# EAGLE board opamp phase ssb (EAGLE 9.1.2)
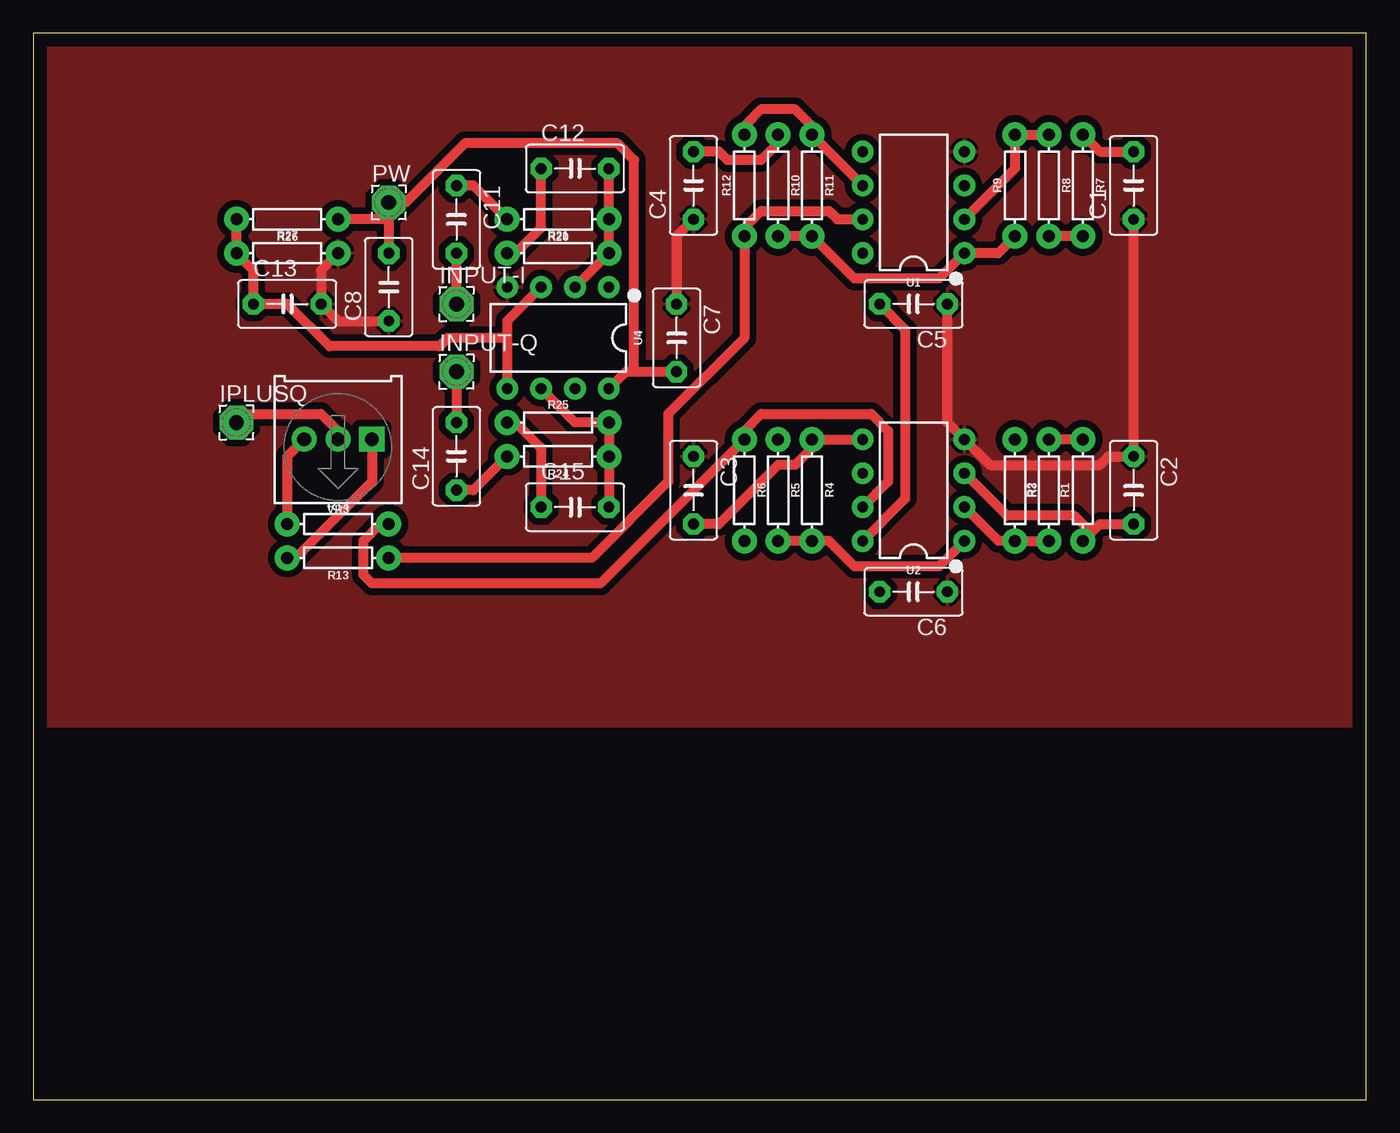
[diagram p0: board, top side]
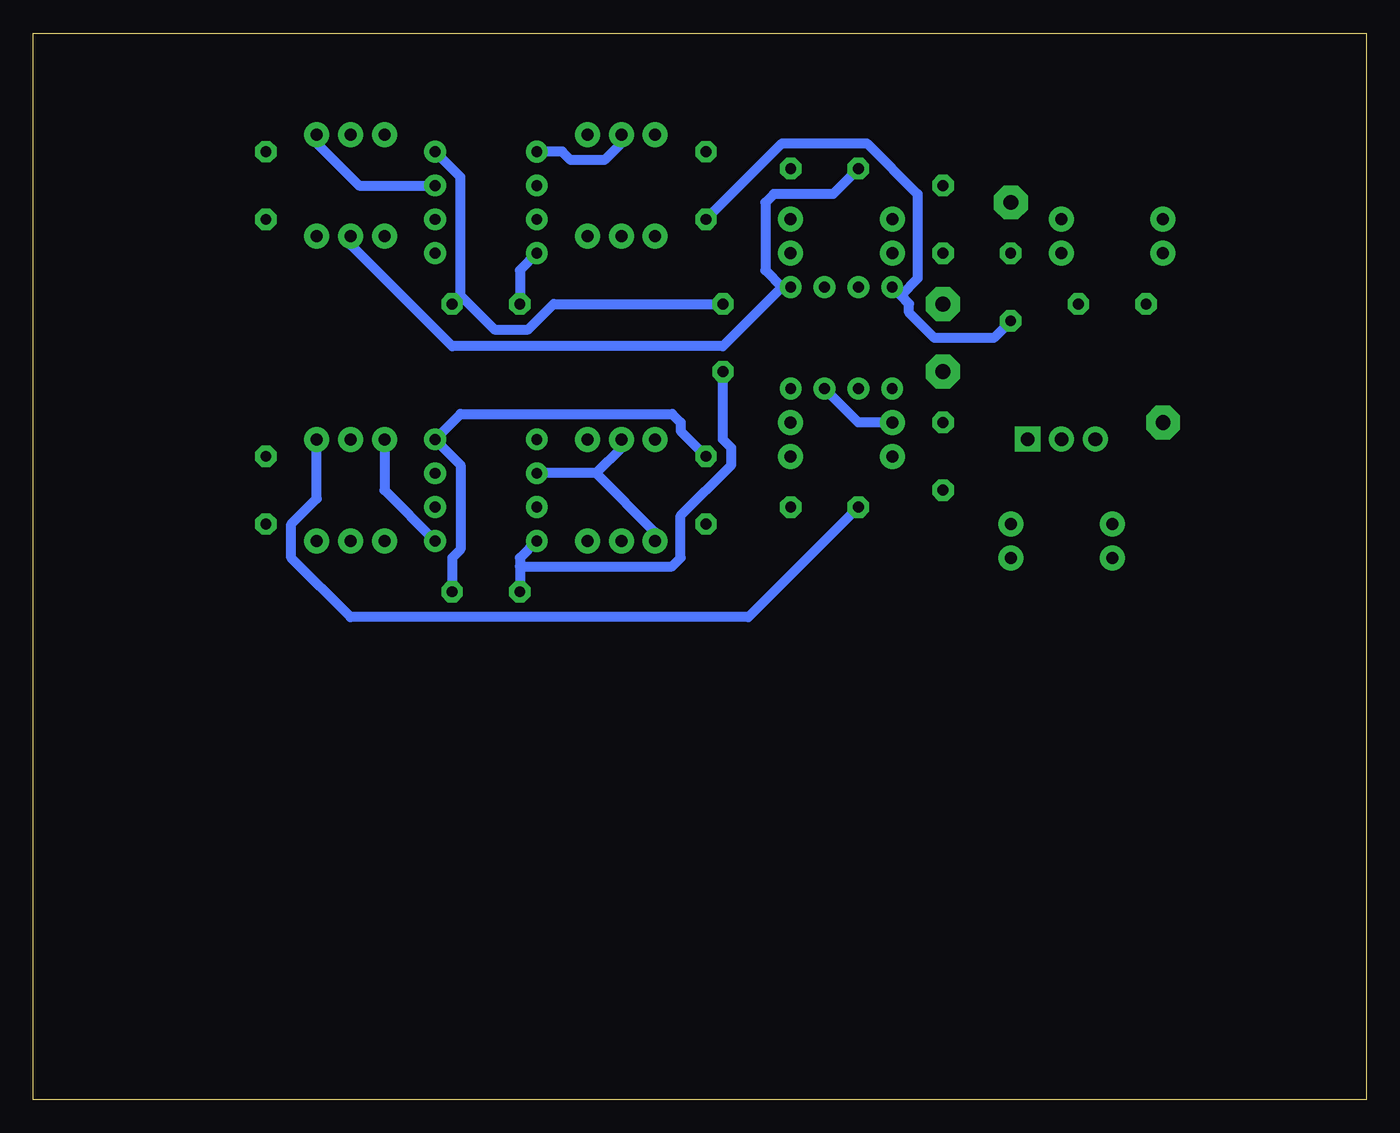
[diagram p1: board, bottom side, seen from below]

Size 100 x 80 mm. Coordinates in mm from the lower left corner, seen from the top.
Outline: 0,0 100,0 100,80 0,80 0,0
Copper layers (1*16): Top 0.035mm / dielectric 1.5mm / Bottom 0.035mm
Design rules "default": minimum track width 6mil, minimum drill 0.35mm, track to track 6mil, track to pad 6mil, pad to pad 6mil, via to via 6mil, smd to smd 6mil, copper to edge 40mil, drill to drill 6mil, minimum pad ring 10mil, minimum via ring 8mil, stop-mask expansion 4mil, vias tented up to drill 0mil, thermal gap 10mil
Net classes: 0 default: width 0.762 mm, drill 0.762 mm, clearance 0.508 mm

## Footprints (pad centres in the part's own frame; a part is rotated, then mirrored left to right if it is on the bottom)
C5B3.5 = drill 0.813 pad 1.6 octagon: 1 -2.54,0; 2 2.54,0
2,54/1,1 = drill 1.118 pad 2.54 octagon: 1 0,0
AXIAL-0.3 = drill 0.9 pad 1.88: P$1 -3.81,0; P$2 3.81,0
DIP08 = drill 0.813 pad 1.626: 1 -3.81,-3.81; 2 -1.27,-3.81; 3 1.27,-3.81; 4 3.81,-3.81; 5 3.81,3.81; 6 1.27,3.81; 7 -1.27,3.81; 8 -3.81,3.81
TRIMPOT-PTH-3386U = drill 1.016 pad 1.88 square: 1 -2.54,-0.015 | drill 1.016 pad 1.88: 2 0,-0.015; 3 2.54,-0.015

## Placement (x,y rotation side)
C1  10nF  [C5B3.5]  82.55,68.58 90 top
C2  10nF  [C5B3.5]  82.55,45.72 270 top
C3  10nF  [C5B3.5]  49.53,45.72 270 top
C4  10nF  [C5B3.5]  49.53,68.58 90 top
C5  100nF  [C5B3.5]  66.04,59.69 180 top
C6  100nF  [C5B3.5]  66.04,38.1 180 top
C7  100nF  [C5B3.5]  48.26,57.15 270 top
C8  100uF  [C5B3.5]  26.67,60.96 90 top
C11  1uF  [C5B3.5]  31.75,66.04 270 top
C12  10nF  [C5B3.5]  40.64,69.85 0 top
C13  10uF  [C5B3.5]  19.05,59.69 0 top
C14  1uF  [C5B3.5]  31.75,48.26 90 top
C15  10nF  [C5B3.5]  40.64,44.45 0 top
INPUT-I  [2,54/1,1]  31.75,59.69 0 top
INPUT-Q  [2,54/1,1]  31.75,54.61 0 top
IPLUSQ  [2,54/1,1]  15.24,50.8 0 top
PW  [2,54/1,1]  26.67,67.31 0 top
R1  9.53k  [AXIAL-0.3]  78.74,45.72 90 top
R2  10k  [AXIAL-0.3]  76.2,45.72 90 top
R3  10k  [AXIAL-0.3]  73.66,45.72 270 top
R4  115k  [AXIAL-0.3]  58.42,45.72 270 top
R5  10k  [AXIAL-0.3]  55.88,45.72 270 top
R6  10k  [AXIAL-0.3]  53.34,45.72 270 top
R7  2.32  [AXIAL-0.3]  78.74,68.58 270 top
R8  10k  [AXIAL-0.3]  76.2,68.58 270 top
R9  10k  [AXIAL-0.3]  73.66,68.58 90 top
R10  28k  [AXIAL-0.3]  55.88,68.58 270 top
R11  10k  [AXIAL-0.3]  58.42,68.58 270 top
R12  10k  [AXIAL-0.3]  53.34,68.58 90 top
R13  1k  [AXIAL-0.3]  22.86,40.64 180 top
R14  1k  [AXIAL-0.3]  22.86,43.18 0 top
R20  1k  [AXIAL-0.3]  39.37,66.04 180 top
R21  100k  [AXIAL-0.3]  39.37,63.5 0 top
R24  1k  [AXIAL-0.3]  39.37,48.26 180 top
R25  100k  [AXIAL-0.3]  39.37,50.8 0 top
R26  10k  [AXIAL-0.3]  19.05,66.04 180 top
R27  10k  [AXIAL-0.3]  19.05,63.5 0 top
U1  LM358  [DIP08]  66.04,67.31 90 top
U2  LM358  [DIP08]  66.04,45.72 90 top
U4  LM358  [DIP08]  39.37,57.15 180 top
VR3  500  [TRIMPOT-PTH-3386U]  22.86,49.53 180 top

## Library data of the parts
C1-C8 C11-C15 = capacitor-wima
INPUT-I INPUT-Q IPLUSQ PW = wirepad
R1-R14 R20 R21 R24-R27 = SparkFun-Resistors; PROD_ID: RES-12182
U1 U2 U4 = SparkFun-IC-Amplifiers; PROD_ID: IC-09172
VR3 = SparkFun-Resistors; PROD_ID: RES-09730; SF_SKU: COM-09806

## Nets
GND: C1.1 C2.1 C3.1 C4.1 C5.1 C6.1 C7.1 C8.1 C13.2 R27.P$2 U1.4 U2.4 U4.4
N$1: C2.2 R1.P$1 U2.3
N$2: R2.P$1 R3.P$2 U2.2
N$3: R3.P$1 R4.P$2 R5.P$2 U2.1
N$4: C13.1 R26.P$2 R27.P$1 U4.3 U4.5
N$5: C3.2 R4.P$1 U2.5
N$6: R5.P$1 R6.P$2 U2.6
N$7: R8.P$1 R9.P$2 U1.2
N$8: R6.P$1 R14.P$2 U2.7
N$9: C1.2 R7.P$1 U1.3
N$10: C12.1 R7.P$2 R8.P$2 R21.P$1 U4.1
N$11: C4.2 R10.P$1 U1.5
N$12: R9.P$1 R10.P$2 R11.P$2 U1.1
N$13: R11.P$1 R12.P$2 U1.6
N$14: R13.P$2 VR3.1
N$15: R12.P$1 R13.P$1 U1.7
N$16: R14.P$1 VR3.3
N$17: IPLUSQ.1 VR3.2
N$18: C15.1 R1.P$2 R2.P$2 R25.P$1 U4.7
N$19: C14.2 INPUT-Q.1
N$27: C12.2 R20.P$1 R21.P$2 U4.2
N$28: C11.2 INPUT-I.1
N$29: C11.1 R20.P$2
N$31: C15.2 R24.P$1 R25.P$2 U4.6
N$33: C14.1 R24.P$2
VCC: C5.2 C6.2 C7.2 C8.2 PW.1 R26.P$1 U1.8 U2.8 U4.8

## Tracks (layer width: path | path; a pad name or v marks a point on that pad's centre or on a via)
GND
  Top 0.762: R27.P$2 21.59,62.23 C13.2 22.86,58.42 C8.1 | C7.1 48.26,64.77 C4.1 | C5.1 68.58,50.8 U2.4 71.75,47.62 80.01,47.62 80.64,48.26 C2.1 C1.1
  Bottom 0.762: 34.92,60.33 34.29,59.69 34.29,59.05 32.38,57.15 27.94,57.15 C8.1 | 34.92,60.33 U4.4 | C3.1 51.44,50.16 51.44,50.8 52.07,51.44 67.94,51.44 U2.4 67.94,47.62 67.94,41.27 68.58,40.64 C6.1 | U1.4 67.94,69.22 67.94,60.33 | C5.1 67.94,60.33 | C7.1 60.96,59.69 62.87,57.78 65.41,57.78 67.94,60.33 | 34.92,60.33 33.66,61.59 33.66,67.94 37.47,71.75 43.81,71.75 C4.1
  pour Top: 0,80.01 100.33,80.01 100.33,27.94 0,27.94
N$1
  Top 0.762: C2.2 80.01,43.18 79.38,42.55 | R1.P$1 79.38,42.55 | U2.3 73.03,43.81 78.11,43.81 79.38,42.55
N$2
  Top 0.762: U2.2 72.39,41.91 R3.P$2 R2.P$1
N$3
  Top 0.762: R5.P$2 R4.P$2 59.69,41.91 61.59,40.01 67.94,40.01 U2.1
  Bottom 0.762: U2.1 73.66,45.72 R3.P$1
N$4
  Top 0.762: R26.P$2 R27.P$1 16.51,62.23 C13.1 19.05,59.69 22.23,56.52 30.48,56.52 31.11,57.15 35.56,57.15 | 35.56,57.15 35.56,58.42 U4.3 | 35.56,57.15 U4.5
N$5
  Top 0.762: C3.2 51.44,43.18 55.88,47.62 57.15,47.62 58.42,48.9 R4.P$1 U2.5
N$6
  Bottom 0.762: 57.78,46.99 U2.6 | 57.78,46.99 55.88,48.9 R5.P$1 | R6.P$2 53.34,42.55 57.78,46.99
N$7
  Top 0.762: U1.2 73.66,69.85 R9.P$2 R8.P$1
N$8
  Top 0.762: U2.7 64.14,46.35 64.14,50.16 62.87,51.44 54.61,51.44 53.34,50.16 R6.P$1 42.55,38.73 25.4,38.73 24.77,39.37 24.77,41.91 26.04,43.18 R14.P$2
N$9
  Top 0.762: C1.2 80.01,71.12 R7.P$1
  Bottom 0.762: U1.3 75.56,68.58 78.74,71.75 R7.P$1
N$10
  Top 0.762: R7.P$2 R8.P$2 | C12.1 38.1,65.41 36.2,63.5 R21.P$1
  Bottom 0.762: 43.81,60.96 U4.1 | 43.81,60.96 45.09,62.23 45.09,67.31 44.45,67.94 40.01,67.94 C12.1 | R8.P$2 76.2,64.14 68.58,56.52 48.26,56.52 43.81,60.96
N$11
  Top 0.762: C4.2 51.44,71.12 52.07,70.48 54.61,70.48 55.88,71.75 R10.P$1
  Bottom 0.762: U1.5 60.33,71.12 59.69,70.48 57.15,70.48 55.88,71.75 R10.P$1
N$12
  Top 0.762: R10.P$2 R11.P$2 61.59,61.59 67.94,61.59 U1.1 72.39,63.5 R9.P$1
N$13
  Top 0.762: U1.6 R11.P$1 58.42,73.03 57.15,74.3 54.61,74.3 53.34,73.03 R12.P$2
N$14
  Top 0.762: R13.P$2 19.68,40.64 25.4,46.35 25.4,49.53 VR3.1
N$15
  Top 0.762: U1.7 60.33,66.04 59.69,66.67 54.61,66.67 53.34,65.41 R12.P$1 53.34,57.15 47.62,51.44 47.62,46.35 41.91,40.64 R13.P$1
N$16
  Top 0.762: R14.P$1 19.05,48.26 20.32,49.53 VR3.3
N$17
  Top 0.762: IPLUSQ.1 15.88,51.44 21.59,51.44 22.86,50.16 VR3.2
N$18
  Top 0.762: R1.P$2 R2.P$2 | C15.1 38.1,48.9 36.2,50.8 R25.P$1
  Bottom 0.762: U4.7 38.1,50.8 R25.P$1 | R1.P$2 78.74,45.09 80.64,43.18 80.64,40.64 76.2,36.2 46.35,36.2 C15.1
N$19
  Top 0.762: INPUT-Q.1 C14.2
N$27
  Top 0.762: C12.2 R20.P$1 R21.P$2 U4.2
N$28
  Top 0.762: INPUT-I.1 C11.2
N$29
  Top 0.762: C11.1 33.02,68.58 R20.P$2
N$31
  Top 0.762: C15.2 R24.P$1 R25.P$2 40.64,50.8 U4.6
N$33
  Top 0.762: C14.1 33.02,45.72 R24.P$2
VCC
  Top 0.762: 26.67,66.04 PW.1 27.94,67.31 32.38,71.75 43.81,71.75 45.09,70.48 45.09,54.61 | 26.67,66.04 C8.2 | 26.67,66.04 R26.P$1 | 45.09,54.61 44.45,54.61 U4.8 | 45.09,54.61 C7.2 | U2.8 65.41,45.09 65.41,57.78 C5.2
  Bottom 0.762: 63.5,40.01 63.5,40.64 U2.8 | 63.5,40.01 C6.2 | C5.2 63.5,62.23 U1.8 | C7.2 48.26,49.53 47.62,48.9 47.62,47.62 51.44,43.81 51.44,40.64 52.07,40.01 63.5,40.01